# Altium PCB Ryu.PcbDoc
Units mil, origin at the board's own origin, x right, y up, seen from the top; angles counter-clockwise.
Board outline 6020 x 4528.86 mil, 2 copper layers (Top Layer, Bottom Layer); 83 components, 56 nets, 486 pads, 116 vias.
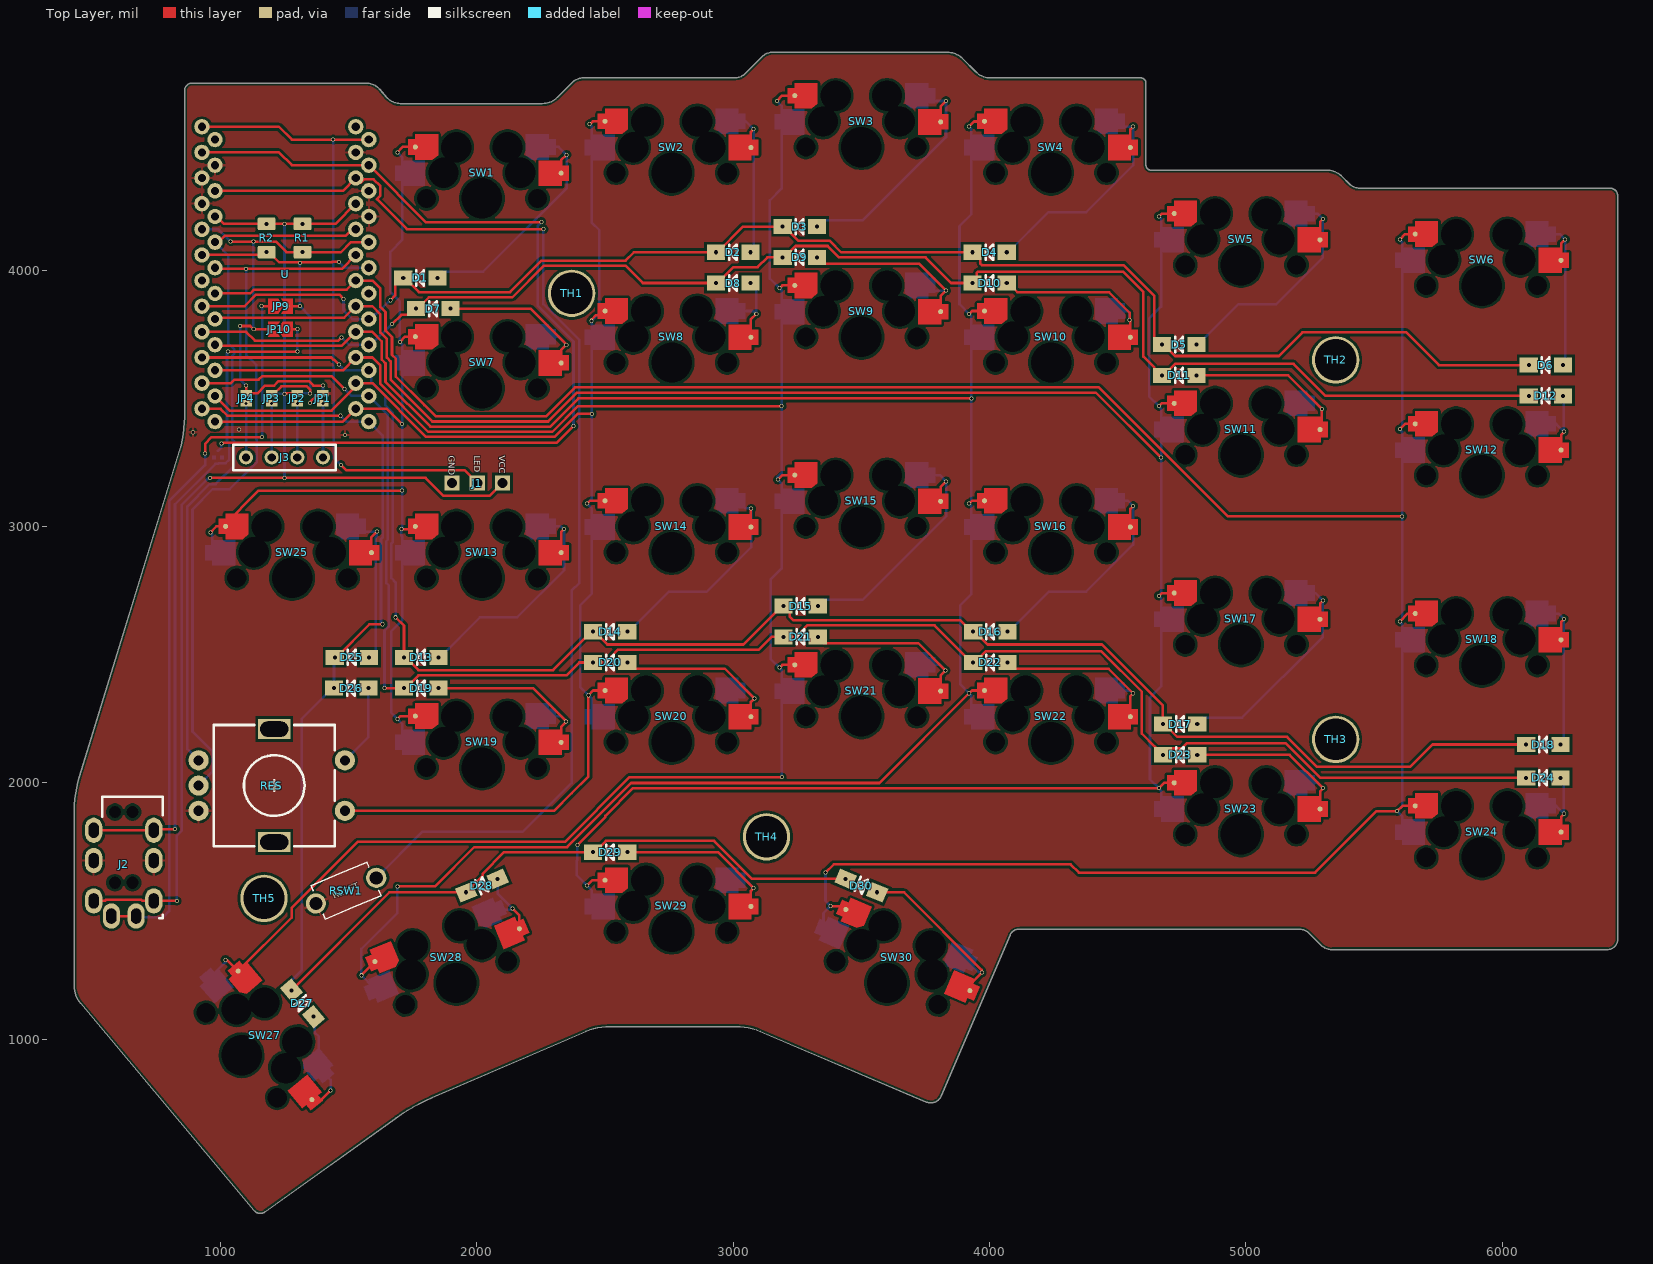
[diagram p0: Top Layer view]
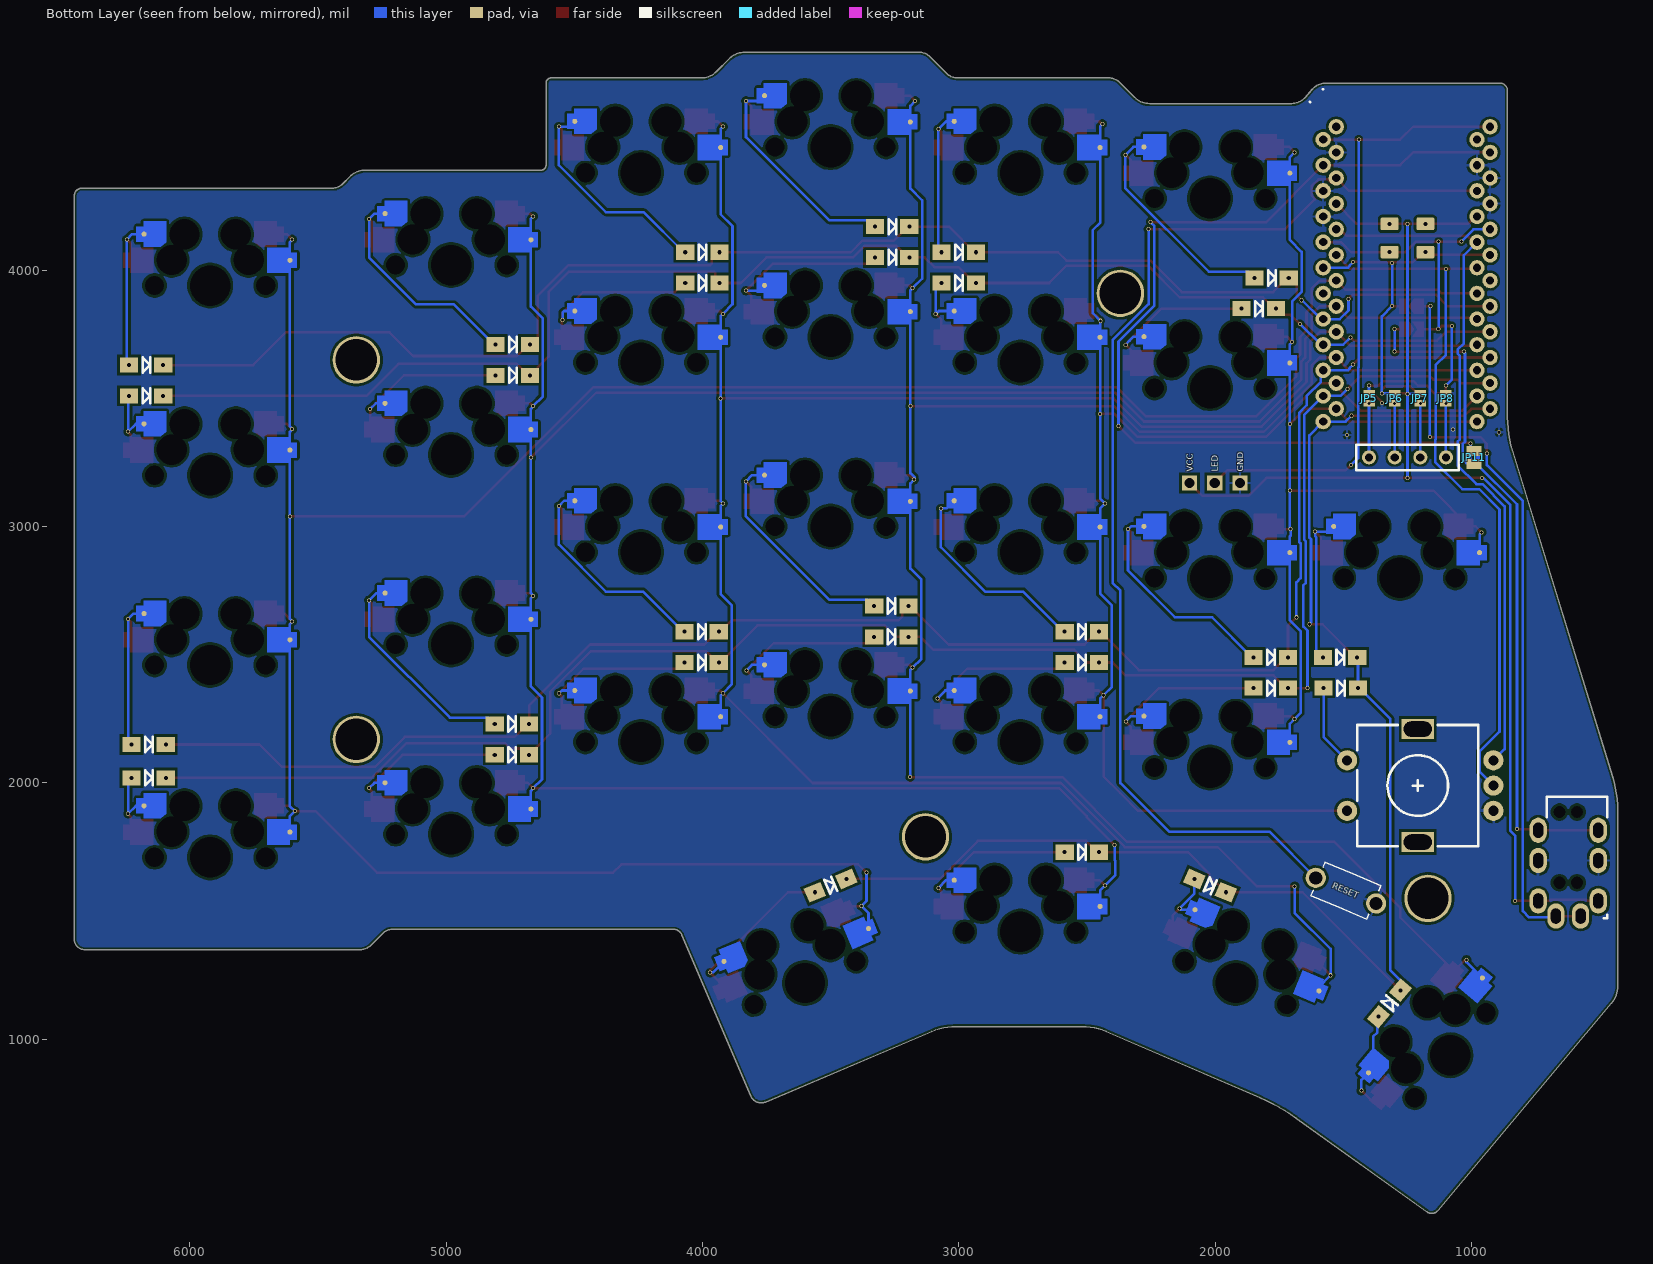
[diagram p1: Bottom Layer view, seen from below]

## Layer stack, top to bottom
Top Solder: solder mask 0.4, Solder Resist, Dk 3.5
Top Layer: signal copper 1.4
Dielectric 1: dielectric 12.6, FR-4, Dk 4.8
Bottom Layer: signal copper 1.4
Bottom Solder: solder mask 0.4, Solder Resist, Dk 3.5

## Board outline
1131.27,332.37 454.09,1141.23 cw(c533.27,1207.52) 430,1207.52 430,1893.38 cw(c873.78,1893.38) 449.56,2023.68 840.44,3296.32 ccw(c416.26,3426.61) 860,3426.62 860,4700 cw(c890,4700) 890,4730 1567.96,4730 cw(c1567.96,4659.4) 1621.1,4705.89 1648.9,4674.11 ccw(c1702.04,4720.6) 1702.04,4650 2255.86,4650 ccw(c2255.86,4732.42) 2314.14,4674.14 2372.93,4732.93 cw(c2414.14,4691.72) 2414.14,4750 3005.86,4750 ccw(c3005.86,4808.28) 3047.07,4767.07 3112.93,4832.93 cw(c3154.14,4791.72) 3154.14,4850 3835.86,4850 cw(c3835.86,4767.59) 3894.14,4825.86 3945.86,4774.14 ccw(c4004.14,4832.43) 4004.14,4750 4590,4750 cw(c4590,4730) 4610,4730 4610,4410 ccw(c4630,4410) 4630,4390 5315.86,4390 cw(c5315.86,4307.6) 5374.14,4365.86 5402.93,4337.07 ccw(c5444.14,4378.29) 5444.14,4320 6420,4320 cw(c6420,4290) 6450,4290 6450,1390 cw(c6410,1389.99) 6410,1350 5334.14,1350 cw(c5334.14,1408.28) 5292.93,1367.07 5247.07,1412.93 ccw(c5205.88,1371.75) 5205.86,1430 4620,1430 4115.16,1430 ccw(c4115.16,1391.85) 4080.09,1406.87 3810.75,778.34 cw(c3770.71,795.49) 3753.67,755.4 3105.22,1030.8 ccw(c3010.87,808.65) 3010.87,1050 2518.51,1050 ccw(c2518.51,814.66) 2425.44,1030.82 1824.45,772.05 ccw(c2121.1,83.05) 1684.12,692.78 1173.72,327 cw(c1155.39,352.57)

## Design rules (kind name [scope] priority, off if disabled: settings)
BoardOutlineClearance [All] p1: gap=10 ignorepadtopadclearanceinfootprint=FALSE except(0: Arc-SplitContinuation Track-SplitContinuation SMDPad-SplitContinuation THPad-SplitContinuation Via-SplitContinuation Fill-SplitContinuation Poly-SplitContinuation Region-SplitContinuation Text-SplitContinuation)
Clearance [All] p1: gap=10 ignorepadtopadclearanceinfootprint=FALSE except(0: Arc-Hole Track-Hole SMDPad-Hole THPad-Hole Via-Hole Fill-Hole Poly-Hole Region-Hole Text-Hole)
HoleSize [All] p1: absolutevalues=TRUE maxlimit=393.7 minlimit=1 maxpercent=80.000 minpercent=20.000
HoleToHoleClearance [All] p1 off: gap=10 allowstackedmicrovias=TRUE
MinimumSolderMaskSliver [All] p1 off: minsoldermaskwidth=10
PolygonConnect [All] p1: connectstyle=Relief reliefconductorwidth=10 reliefentries=4 polygonreliefangle="90 Angle" airgapwidth=10
RoutingVias [All] p1: holewidth=11.81 width=15.75 viastyle="Through Hole" minholewidth=11.81 minwidth=15.75 maxholewidth=11.81 maxwidth=15.75
SilkToSolderMaskClearance [IsPad] p1: minsilkscreentomaskgap=2.5 clearancetoexposedcopper=TRUE
SolderMaskExpansion [All] p1: expansion=4 istentingtop=FALSE
Width [All] p1: maxlimit=19.68 minlimit=1.97 preferedwidth=10
26 further rules are at their usual default settings.

## Components (designator, comment, footprint, x,y, rotation, side; value= is the part's Value field where it differs from the comment)
D1 "D" D_SOD123 1780,3970 r0 top
D2 "D" D_SOD123 3000,4070 r0 top
D3 "D" D_SOD123 3260,4170 r0 top
D4 "D" D_SOD123 4000,4070 r0 top
D5 "D" D_SOD123 4740,3710 r0 top
D6 "D" D_SOD123 6170,3630 r0 top
D7 "D" D_SOD123 1830,3850 r0 top
D8 "D" D_SOD123 3000,3950 r0 top
D9 "D" D_SOD123 3260,4050 r0 top
D10 "D" D_SOD123 4000,3950 r0 top
D11 "D" D_SOD123 4740,3590 r0 top
D12 "D" D_SOD123 6170,3510 r0 top
D13 "D" D_SOD123 1783.07,2490 r0 top
D14 "D" D_SOD123 2520,2590 r0 top
D15 "D" D_SOD123 3263.07,2690 r0 top
D16 "D" D_SOD123 4003.07,2590 r0 top
D17 "D" D_SOD123 4743.07,2230 r0 top
D18 "D" D_SOD123 6160,2150 r0 top
D19 "D" D_SOD123 1783.07,2370 r0 top
D20 "D" D_SOD123 2520,2470 r0 top
D21 "D" D_SOD123 3263.07,2570 r0 top
D22 "D" D_SOD123 4003.07,2470 r0 top
D23 "D" D_SOD123 4743.07,2110 r0 top
D24 "D" D_SOD123 6160,2020 r0 top
D25 "D" D_SOD123 1513.07,2490 r0 top
D26 "D" D_SOD123 1510,2370 r0 top
D27 "D" D_SOD123 1320,1140 r310 top
D28 "D" D_SOD123 2020,1600 r23 top
D29 "D" D_SOD123 2520,1730 r0 top
D30 "D" D_SOD123 3500,1600 r337 top
J1 "LED" LED 2100,3170 r270 top
J2 "4PIN" TRRS 657.32,1945.51 r0 top
J3 "OLED" OLED 1400,3270 r180 top
JP1 "JP" JUMPER 1400,3500 r90 top
JP2 "JP" JUMPER 1300,3500 r90 top
JP3 "JP" JUMPER 1200,3500 r90 top
JP4 "JP" JUMPER 1100,3500 r90 top
JP5 "JP" JUMPER 1400,3500 r90 bottom
JP6 "JP" JUMPER 1300,3500 r90 bottom
JP7 "JP" JUMPER 1200,3500 r90 bottom
JP8 "JP" JUMPER 1100,3500 r90 bottom
JP9 "IC2SCL" JUMPER_Triangle 1234,3860 r0 top
JP10 "IC2SDA" JUMPER_Triangle 1234,3770 r180 top
JP11 "Serial" JUMPER_DATA 990,3270 r90 bottom
R1 "R" RESISTOR 1320,4125.67 r270 top
R2 "R" RESISTOR 1180,4125.67 r270 top
RES "SW26" Rotary_Encoder_Alps 1210,1990 r0 top
RSW1 "SW_RST" RST_SWITCH 1490,1580 r23 top
SW1 "SW_PUSH" 1u-CherryMX-Hotswap-Dualside 2020,4280 r0 top
SW2 "SW_PUSH" 1u-CherryMX-Hotswap-Dualside 2760,4380 r0 top
SW3 "SW_PUSH" 1u-CherryMX-Hotswap-Dualside 3500,4480 r0 top
SW4 "SW_PUSH" 1u-CherryMX-Hotswap-Dualside 4240,4380 r0 top
SW5 "SW_PUSH" 1u-CherryMX-Hotswap-Dualside 4980,4020 r0 top
SW6 "SW_PUSH" 1.5u-CHERRYmx-hotswap-dualside 5920,3940 r0 top
SW7 "SW_PUSH" 1u-CherryMX-Hotswap-Dualside 2020,3540 r0 top
SW8 "SW_PUSH" 1u-CherryMX-Hotswap-Dualside 2760,3640 r0 top
SW9 "SW_PUSH" 1u-CherryMX-Hotswap-Dualside 3500,3740 r0 top
SW10 "SW_PUSH" 1u-CherryMX-Hotswap-Dualside 4240,3640 r0 top
SW11 "SW_PUSH" 1u-CherryMX-Hotswap-Dualside 4980,3280 r0 top
SW12 "SW_PUSH" 1.5u-CHERRYmx-hotswap-dualside 5920,3200 r0 top
SW13 "SW_PUSH" 1u-CherryMX-Hotswap-Dualside 2020,2800 r0 top
SW14 "SW_PUSH" 1u-CherryMX-Hotswap-Dualside 2760,2900 r0 top
SW15 "SW_PUSH" 1u-CherryMX-Hotswap-Dualside 3500,3000 r0 top
SW16 "SW_PUSH" 1u-CherryMX-Hotswap-Dualside 4240,2900 r0 top
SW17 "SW_PUSH" 1u-CherryMX-Hotswap-Dualside 4980,2540 r0 top
SW18 "SW_PUSH" 1.5u-CHERRYmx-hotswap-dualside 5920,2460 r0 top
SW19 "SW_PUSH" 1u-CherryMX-Hotswap-Dualside 2020,2060 r0 top
SW20 "SW_PUSH" 1u-CherryMX-Hotswap-Dualside 2760,2160 r0 top
SW21 "SW_PUSH" 1u-CherryMX-Hotswap-Dualside 3500,2260 r0 top
SW22 "SW_PUSH" 1u-CherryMX-Hotswap-Dualside 4240,2160 r0 top
SW23 "SW_PUSH" 1u-CherryMX-Hotswap-Dualside 4980,1800 r0 top
SW24 "SW_PUSH" 1.5u-CHERRYmx-hotswap-dualside 5920,1710 r0 top
SW25 "SW_PUSH" 1u-CherryMX-Hotswap-Dualside 1280,2800 r0 top
SW27 "SW_PUSH" 1.5u-CHERRYmx-hotswap-dualside 1082.51,938.05 r310 top
SW28 "SW_PUSH" 1u-CherryMX-Hotswap-Dualside 1920,1220 r23 top
SW29 "SW_PUSH" 1u-CherryMX-Hotswap-Dualside 2760,1420 r0 top
SW30 "SW_PUSH" 1u-CherryMX-Hotswap-Dualside 3600,1220 r337 top
TH1 "HOLE" M2_TH_HOLE 2370,3910 r0 top
TH2 "HOLE" M2_TH_HOLE 5350,3650 r0 top
TH3 "HOLE" M2_TH_HOLE 5350,2170 r0 top
TH4 "HOLE" M2_TH_HOLE 3130,1790 r0 top
TH5 "HOLE" M2_TH_HOLE 1170,1550 r0 top
U "ProMicro" ProMicro 1275,3978 r0 top

## Footprints (in the part's own frame and the unit in brackets; to place one, negate y for a bottom-side part, rotate by r counter-clockwise, add the part's x,y. Pads: shape width x height; smd on the part's side, far side on the other; paste and mask are expansions set on the pad)
1.5u-CHERRYmx-hotswap-dualside [mm]
  round 0.5 smd far side mask+0: 1(-7.9,2.5) 2(6.55,5.1)
  round 0.5 smd mask+0: 1(-6.6,5.1) 2(7.85,2.5)
  round 0 hole 1.9: ""(-5.5,0) ""(5.5,0)
  round 0 hole 3: ""(-3.81,2.54) ""(-2.54,5.08) ""(2.54,5.08) ""(3.81,2.54)
  round 0 hole 4: ""(0,0)
  Top Layer region: 5.65,3.75 7.9,3.75 7.9,3.25 8.6,3.25 8.6,1.75 7.9,1.75 7.9,1.25 5.65,1.25
  Top Layer region: -4.35,6.35 -6.6,6.35 -6.6,5.85 -7.3,5.85 -7.3,4.35 -6.6,4.35 -6.6,3.85 -4.9,3.85 -4.35,4.3
  Bottom Layer region: -5.65,1.25 -7.9,1.25 -7.9,1.75 -8.6,1.75 -8.6,3.25 -7.9,3.25 -7.9,3.75 -5.65,3.75
  Bottom Layer region: 4.35,6.35 6.6,6.35 6.6,5.85 7.3,5.85 7.3,4.35 6.6,4.35 6.6,3.85 4.9,3.85 4.35,4.3
1u-CherryMX-Hotswap-Dualside [mm]
  round 0.5 smd far side mask+0: 1(-7.9,2.5) 2(6.55,5.1)
  round 0.5 smd mask+0: 1(-6.6,5.1) 2(7.85,2.5)
  round 0 hole 1.9: ""(-5.5,0) ""(5.5,0)
  round 0 hole 3: ""(-3.81,2.54) ""(-2.54,5.08) ""(2.54,5.08) ""(3.81,2.54)
  round 0 hole 4 mask+0.102: ""(0,0)
  Top Layer region: 5.65,3.75 7.9,3.75 7.9,3.25 8.6,3.25 8.6,1.75 7.9,1.75 7.9,1.25 5.65,1.25
  Top Layer region: -4.35,6.35 -6.6,6.35 -6.6,5.85 -7.3,5.85 -7.3,4.35 -6.6,4.35 -6.6,3.85 -4.9,3.85 -4.35,4.3
  Bottom Layer region: -5.65,1.25 -7.9,1.25 -7.9,1.75 -8.6,1.75 -8.6,3.25 -7.9,3.25 -7.9,3.75 -5.65,3.75
  Bottom Layer region: 4.35,6.35 6.6,6.35 6.6,5.85 7.3,5.85 7.3,4.35 6.6,4.35 6.6,3.85 4.9,3.85 4.35,4.3
D_SOD123 [mm]
  rect 1.8x1.5 hole 0.4: 1(-1.7,0) 2(1.7,0)
  silkscreen extent -0.4,-0.75 0.35,0.75
JUMPER [mil]
  rect 25x45 smd mask+8.03: J1(-19.7,0) J2(19.7,0)
JUMPER_DATA [mm]
  rect 1x1.5 smd: J1(0.65,0) J2(-0.65,0)
  Top Layer region: -0.2,0.6 0.2,0.6 0.2,0.2 -0.2,0.2
  Top Layer region: -0.2,-0.2 0.2,-0.2 0.2,-0.6 -0.2,-0.6
JUMPER_Triangle [mm]
  round 0.1 smd mask+0: J1(-0.65,0) J2(0.85,0)
  Top Layer region: -1.225,-0.75 -0.225,-0.75 0.275,0 -0.225,0.75 -1.225,0.75
  Top Layer region: 0.075,0.75 0.575,0 0.075,-0.75 1.225,-0.75 1.225,0.75
LED [mil]
  rect 60x60 hole 39.37: 1(0,0) 2(0,-98.43) 3(0,-196.85)
M2_TH_HOLE [mm]
  round 4.7 hole 4.1: ""(0,0)
OLED [mil]
  round 55 hole 32: 1(0,0) 2(100,0) 3(200,0) 4(300,0)
  silkscreen extent -50,-50 350,50
ProMicro [mil]
  round 60 hole 32: 1(-347.24,581.5) 1(303.9,531.5) 2(-347.24,481.5) 2(303.9,431.5) 3(-347.24,381.5) 3(303.9,331.5) 4(-347.24,281.5) 4(303.9,231.5) 5(-347.24,181.5) 5(303.9,131.5) 6(-347.24,81.5) 6(303.9,31.5) 7(-347.24,-18.5) 7(303.9,-68.5) 8(-347.24,-118.5) 8(303.9,-168.5) 9(-347.24,-218.5) 9(303.9,-268.5) 10(-347.24,-318.5) 10(303.9,-368.5) 11(-347.24,-418.5) 11(303.9,-468.5) 12(-347.24,-518.5) 12(303.9,-568.5) 13(-296.1,-568.5) 13(252.76,-518.5) 14(-296.1,-468.5) 14(252.76,-418.5) 15(-296.1,-368.5) 15(252.76,-318.5) 16(-296.1,-268.5) 16(252.76,-218.5) 17(-296.1,-168.5) 17(252.76,-118.5) 18(-296.1,-68.5) 18(252.76,-18.5) 19(-296.1,31.5) 19(252.76,81.5) 20(-296.1,131.5) 20(252.76,181.5) 21(-296.1,231.5) 21(252.76,281.5) 22(-296.1,331.5) 22(252.76,381.5) 23(-296.1,431.5) 23(252.76,481.5) 24(-296.1,531.5) 24(252.76,581.5)
RESISTOR [mm]
  rrect20% 1.25x1.75 hole 0.4: 1(-1.4,0)
  rrect20% 1.25x1.75 hole 0.4 mask+0.102: 2(1.4,0)
Rotary_Encoder_Alps [mm]
  round 2 hole 1: A(-7.5,2.5) B(-7.5,0) C(-7.5,-2.5) S1(7,-2.5) S2(7,2.5)
  rect 3.2x2 hole 1.5 slot 2.8 at 0 deg: MP(0,-5.6) MP(0,5.6)
  silkscreen extent -6,-6 6,6
RST_SWITCH [mm]
  round 2 hole 1.3: 1(-3.25,0) 2(3.25,0)
  silkscreen extent -3,-1.8 3,1.8
TRRS [mm]
  oval 1.7x2.5 hole 1.5 slot 1 at 0 deg: 1(-3.85,-10.3) 1(2.1,-10.3) 2(-3.85,-6.3) 2(2.1,-6.3) 3(-3.85,-3.3) 3(2.1,-3.3) 4(-2.1,-11.8) 4(0.35,-11.8)
  round 0 hole 1.2 mask+0: ""(-1.75,-8.5) ""(-1.75,-1.5) ""(0,-8.5) ""(0,-1.5)
  silkscreen extent -3,-12 3,0

## Part data
JP9 JP10: library part JP
JP11: library part JP_C
RES: library part SW

## Via types
v1: diameter 15.75, hole 11.81, Top Layer to Bottom Layer, 116 vias

## Nets (pads, with @x,y where several pads share a name; then routed paths per layer and width w, separated by ;. In a path a pad name is that pad's centre, name@x,y a point inside that pad or via, vN(x,y) a via of type N, cw(c..) or ccw(c..) an arc to the next point about the centre after c; other vN are vias at no path point)
col0: SW6.1 SW12.1 SW18.1 SW24.1 SW30.1 U.18 | length 10584.5
  Top Layer w10: U.18@978.9,3909.5 1116.35,3909.5 1131.38,3924.53 1492.79,3924.53 1527.76,3959.5 1592.54,3959.5 1623.9,3928.14 1623.9,3856.42 1643.9,3836.42 1643.9,3764.7 1669.3,3739.3 1669.3,3670 1683.9,3655.4 1683.9,3585.46 1795.21,3474.15 1795.85,3474.15 1840,3430 2270,3430 2382.87,3542.87 4426.48,3542.87 4929.36,3040 v1(5608.98,3040) ; v1(3360,1650) 3392.18,1682.18 4315.78,1682.18 4347.95,1650 5270,1650 5510,1890 v1(5590,1890) 5610.79,1910.79 SW24.1@5660.16,1910.79 ; v1(3380,1520) 3425.62,1520 SW30.1@3439.27,1506.35 ; v1(5600,2630) 5630.79,2660.79 SW18.1@5660.16,2660.79 ; v1(5600,3380) 5620.79,3400.79 SW12.1@5660.16,3400.79 ; v1(5600,4120) 5620.79,4140.79 SW6.1@5660.16,4140.79
  Bottom Layer w10: SW30.1@3352.16,1432.13 3352.16,1492.16 v1(3380,1520) 3360,1540 v1(3360,1650) ; v1(5600,4120) 5600,4118.44 5608.98,4109.47 5608.98,4038.43 5608.98,3390.53 5600,3381.56 v1(5600,3380) 5600,3378.44 5608.98,3369.47 5608.98,3298.43 v1(5608.98,3040) 5608.98,2640.53 5600,2631.56 v1(5600,2630) 5600,2628.44 5608.98,2619.47 5608.98,2558.43 5608.98,1908.98 v1(5590,1890) 5608.98,1871.02 SW24.1@5608.98,1808.43
col1: SW5.1 SW11.1 SW17.1 SW23.1 SW29.1 U.17 | length 9540.8
  Top Layer w10: U.17@978.9,3809.5 983.93,3814.53 1482.79,3814.53 1527.76,3859.5 1592.54,3859.5 1623.9,3828.14 1623.9,3756.42 1649.3,3731.02 1649.3,3659.3 1663.9,3644.7 1663.9,3572.99 1826.89,3410 2278.28,3410 2391.16,3522.87 4414.13,3522.87 v1(4667.99,3269.02) ; v1(2392.03,1757.97) 2501.57,1867.5 2501.57,1871.57 2610,1980 v1(4660,1980) 4680.79,2000.79 SW23.1@4720.16,2000.79 ; v1(2430,1600) 2450.79,1620.79 SW29.1@2500.16,1620.79 ; v1(4660,2730) 4661.56,2730 4672.34,2740.79 SW17.1@4720.16,2740.79 ; v1(4660,3470) 4670.79,3480.79 SW11.1@4720.16,3480.79 ; v1(4660,4210) 4661.56,4210 4672.34,4220.79 SW5.1@4720.16,4220.79
  Bottom Layer w10: v1(2392.03,1757.97) 2392.03,1699.22 2390,1697.19 2390,1640 v1(2430,1600) 2448.98,1581.02 SW29.1@2448.98,1518.43 ; v1(4660,4210) 4668.98,4201.02 4668.98,4118.43 4668.98,3858.2 4622.64,3811.86 4622.64,3507.36 v1(4660,3470) 4660,3468.44 4668.98,3459.47 4668.98,3378.43 v1@4668.98,3268.03 ; v1(4667.99,3269.02) v1@4668.98,3268.03 ; SW23.1@4668.98,1898.43 4668.98,1969.47 4660,1978.44 v1(4660,1980) 4625.71,2014.29 4625.71,2333.4 4668.98,2376.67 4668.98,2638.43 4668.98,2721.02 v1(4660,2730) 4660,2731.56 4668.98,2740.53 v1@4668.98,3268.03
col2: SW4.1 SW10.1 SW16.1 SW22.1 SW28.1 U.16 | length 9007.7
  Top Layer w10: U.16@978.9,3709.5 982.92,3705.47 1473.73,3705.47 1527.76,3759.5 1592.54,3759.5 1629.3,3722.73 1629.3,3651.02 1643.9,3636.42 1643.9,3564.7 1818.6,3390 2286.57,3390 2396.57,3500 v1(3928.98,3500) ; v1(1550,1250) 1550,1250.47 1602.36,1302.83 SW28.1@1602.36,1303.3 ; v1(1690,1596.72) 1836.72,1596.72 1990,1750 2351.72,1750 2601.72,2000 3570,2000 v1(3920,2350) 3921.56,2350 3932.34,2360.79 SW22.1@3980.16,2360.79 ; v1(3920,3090) 3921.56,3090 3932.34,3100.79 SW16.1@3980.16,3100.79 ; v1(3920,3830) 3921.56,3830 3932.34,3840.79 SW10.1@3980.16,3840.79 ; v1(3920,4560) 3940,4580 3979.37,4580 SW4.1@3980.16,4580.79
  Bottom Layer w10: SW28.1@1595.24,1189.07 1595.24,1204.76 v1(1550,1250) 1550,1353.36 1690,1493.36 v1(1690,1596.72) ; v1(3920,4560) 3928.98,4551.02 3928.98,4478.43 3928.98,4218.2 3882.64,4171.86 3882.64,3867.36 v1(3920,3830) 3928.98,3821.02 3928.98,3738.43 v1(3928.98,3500) 3928.98,3100.53 3920,3091.56 v1(3920,3090) 3928.98,3081.02 3928.98,2998.43 3928.98,2736.67 3885.71,2693.4 3885.71,2384.29 v1(3920,2350) 3928.98,2341.02 SW22.1@3928.98,2258.43
col3: SW3.1 SW9.1 SW15.1 SW21.1 SW27.1 U.15 | length 8067.9
  Top Layer w10: U.15@978.9,3609.5 1477.76,3609.5 1527.76,3659.5 1592.54,3659.5 1623.9,3628.14 1623.9,3556.42 1810.32,3370 2294.85,3370 2394.85,3470 v1(3188.98,3470) ; v1(1020,1310) 1021.1,1308.9 1026.56,1308.9 1069.3,1266.16 1277.52,1474.38 1277.52,1512.2 1535.32,1770 2343.43,1770 2596.31,2022.87 v1(3190,2022.87) ; v1(3170,4660) 3190.79,4680.79 SW3.1@3240.16,4680.79 ; v1(3174.65,3182.83) 3192.61,3200.79 SW15.1@3240.16,3200.79 ; v1(3180,2450) 3181.56,2450 3192.34,2460.79 SW21.1@3240.16,2460.79 ; v1(3180,3930) 3181.56,3930 3192.34,3940.79 SW9.1@3240.16,3940.79
  Bottom Layer w10: SW27.1@957.99,1239.57 1020,1301.58 v1(1020,1310) ; v1(3170,4660) 3188.98,4641.02 3188.98,4578.43 3188.98,4318.2 3142.64,4271.86 3142.64,3967.36 v1(3180,3930) 3188.98,3921.02 3188.98,3838.43 v1(3188.98,3470) 3188.98,3208.98 3172.89,3192.89 3173.56,3192.22 3173.56,3183.93 v1(3174.65,3182.83) 3188.98,3168.51 3188.98,3098.43 3188.98,2836.67 3145.71,2793.4 3145.71,2484.29 v1(3180,2450) 3188.98,2441.02 3188.98,2358.43 3189.49,2357.91 3189.49,2023.39 v1(3190,2022.87)
col4: RES.S1 SW2.1 SW8.1 SW14.1 SW20.1 U.14 | length 5668.1
  Top Layer w10: U.14@978.9,3509.5 1036.02,3452.37 1434.14,3452.37 1527.76,3545.98 1527.76,3559.5 1592.54,3559.5 1802.03,3350 2303.14,3350 2393.14,3440 v1(2448.98,3440) ; RES.S1 2301.57,1891.57 2370,1960 2435.46,2025.46 v1(2435.46,2342.23) 2454.02,2360.79 SW20.1@2500.16,2360.79 ; v1(2430,3090) 2431.56,3090 2442.34,3100.79 SW14.1@2500.16,3100.79 ; v1(2440,4570) 2441.56,4570 2452.34,4580.79 SW2.1@2500.16,4580.79 ; v1(2447.2,3802.8) 2448.3,3803.9 2448.3,3808.18 2463.68,3823.56 2482.26,3823.56 2499.49,3840.79 SW8.1@2500.16,3840.79
  Bottom Layer w10: v1(2440,4570) 2448.98,4561.02 2448.98,4478.43 2448.98,4184.91 2477.52,4156.36 2477.52,3833.12 2448.98,3804.57 2448.98,3738.43 v1(2448.98,3440) 2448.98,3108.98 v1(2430,3090) 2448.98,3071.02 2448.98,2998.43 2448.98,2738.2 2402.64,2691.86 2402.64,2375.05 v1(2435.46,2342.23) 2448.98,2328.71 SW20.1@2448.98,2258.43
col5: SW1.1 SW7.1 SW13.1 SW19.1 SW25.1 U.13 | length 4346.6
  Top Layer w10: v1(960.6,2977.71) 983.68,3000.79 1010,3000.79 ; U.13@978.9,3409.5 1477.76,3409.5 1527.76,3459.5 1649.48,3459.5 v1(1708.98,3400) ; SW25.1@1020.16,3000.79 1010,3000.79 ; v1(1690,2250) 1691.56,2250 1702.34,2260.79 SW19.1@1760.16,2260.79 ; v1(1690,4460) 1710.79,4480.79 SW1.1@1760.16,4480.79 ; v1(1700,3720) 1720.79,3740.79 SW7.1@1760.16,3740.79 ; v1(1706.13,2990) 1746.75,2990 1757.54,3000.79 SW13.1@1760.16,3000.79 ; v1(1708.98,3140) 1149.21,3140 1010,3000.79
  Bottom Layer w10: v1(960.6,2977.71) 968.98,2969.34 SW25.1@968.98,2898.43 ; v1(1690,4460) 1708.98,4441.02 1708.98,4378.43 1708.98,4118.2 1662.64,4071.86 1662.64,3915.39 1700,3878.03 v1(1700,3720) 1708.98,3711.02 1708.98,3638.43 v1(1708.98,3400) v1(1708.98,3140) v1@1708.98,2992.85 ; v1(1706.13,2990) 1706.13,2964.98 1708.98,2962.13 1708.98,2898.43 1708.98,2634.61 1665.71,2591.34 1665.71,2274.29 v1(1690,2250) 1708.98,2231.02 SW19.1@1708.98,2158.43
DATA: JP11.J1 U.2 | length 3734.7
  Top Layer w10: U.2@927.76,4459.5 1228.33,4459.5 1278.33,4409.5 1578.9,4409.5 1802.13,4186.26 2247.7,4186.26 2249.94,4188.5 v1(2251.5,4188.5) ; v1(1003.55,3324.73) 1004.65,3325.83 1011.83,3325.83 1013.13,3327.13 2312.61,3327.13 v1(2377.13,3391.64)
  Bottom Layer w10: JP11.J1 1003.55,3309.14 v1(1003.55,3324.73) ; v1(2251.5,4188.5) 2251.5,4186.95 2237.13,4172.58 2237.13,3861.8 2377.13,3721.8 v1(2377.13,3391.64)
ENCA: RES.A U.20 | length 2738.1
  Top Layer w10: U.20@979.56,4110.16 978.9,4109.5 992.43,4109.5 1017.43,4134.5 1489.23,4134.5 1514.23,4159.5 U.20@1527.76,4159.5
  Bottom Layer w10: RES.A 871.16,2131.99 871.16,3078.84 957.94,3165.62 981.64,3165.62 1054.53,3238.51 1054.53,3331.21 1045.74,3340 1045.74,3665.76 1054.53,3674.55 1054.53,3690.19 1030,3714.72 1030,4058.39 U.20@978.9,4109.5
ENCB: RES.B U.19 | length 2803.3
  Top Layer w10: U.19@978.9,4009.5 983.2,4005.2 v1(1100,4005.2) 1473.46,4005.2 U.19@1527.76,4059.5
  Bottom Layer w10: RES.B 969.09,2044.37 969.09,2122.06 891.16,2200 891.16,3066.78 970,3145.62 1035.72,3145.62 1142.5,3252.4 1142.5,3338.03 1140,3340.53 1140,3630 1100,3670 v1(1100,4005.2)
GND: J1.3 J2.2 JP1.J2 JP8.J2 RES.C RSW1.1 U.3 U.4 U.23 | length 68.3
  Top Layer w10: v1(1350,3482) 1351.1,3483.1 1351.1,3487.61 1375.69,3512.2 1392.5,3512.2 JP1.J2
  other v1: 1486,3358 893,3368 1073,3378
LED: J1.2 U.1 | length 2514.8
  Top Layer w10: U.1@927.76,4559.5 1228.33,4559.5 1278.33,4509.5 U.1@1578.9,4509.5 ; v1(1470,3240) 1490,3220 1951.57,3220 J1.2
  Bottom Layer w10: v1(1440,4510) 1440,3622.9 1442.5,3620.4 1442.5,3267.5 v1(1470,3240)
NetD1_2: D1.2 SW1.2 | length 943.6
  Top Layer w10: SW1.2@2329.06,4378.43 2329.06,4429.06 v1(2350,4450)
  Bottom Layer w10: D1.2 1871.46,3994.53 2025.17,3994.53 2350,4319.36 v1(2350,4450) 2319.21,4480.79 SW1.2@2277.87,4480.79
NetD2_2: D2.2 SW2.2 | length 636.4
  Top Layer w10: SW2.2@3069.06,4478.43 3069.06,4539.06 v1(3080,4550)
  Bottom Layer w10: SW2.2@3017.87,4580.79 3049.21,4580.79 v1(3080,4550) 3080,4083.07 D2.2
NetD3_2: D3.2 SW3.2 | length 959.4
  Top Layer w10: SW3.2@3809.06,4578.43 3809.06,4639.06 v1(3830,4660)
  Bottom Layer w10: D3.2 3351.46,4194.53 3505.17,4194.53 3830,4519.36 v1(3830,4660) 3778.66,4660 SW3.2@3757.87,4680.79
NetD4_2: D4.2 SW4.2 | length 941.1
  Top Layer w10: SW4.2@4549.06,4478.43 4549.06,4549.06 v1(4560,4560)
  Bottom Layer w10: D4.2 4072.83,4070 4229.25,4226.41 4377.05,4226.41 4560,4409.36 v1(4560,4560) 4518.66,4560 SW4.2@4497.87,4580.79
NetD5_2: D5.2 SW5.2 | length 941.1
  Top Layer w10: SW5.2@5289.06,4118.43 5289.06,4189.06 v1(5300,4200)
  Bottom Layer w10: D5.2 4812.83,3710 4969.25,3866.41 5117.05,3866.41 5300,4049.36 v1(5300,4200) 5279.21,4220.79 SW5.2@5237.87,4220.79
NetD6_2: D6.2 SW6.2 | length 657.3
  Top Layer w10: SW6.2@6229.06,4038.43 6229.06,4103.63 6245.04,4119.61 v1(6245.04,4120)
  Bottom Layer w10: SW6.2@6177.87,4140.79 6224.25,4140.79 v1(6245.04,4120) 6245.04,3638.11 D6.2
NetD7_2: D7.2 SW7.2 | length 676.9
  Top Layer w10: D7.2 2210,3850 2350,3710 2329.06,3689.06 SW7.2@2329.06,3638.43
  Bottom Layer w10: SW7.2@2277.87,3740.79 2319.21,3740.79 2333.47,3726.53 2333.47,3725.74 2348.83,3710.38 v1(2348.83,3708.83)
NetD8_2: D8.2 SW8.2 | length 306.4
  Top Layer w10: SW8.2@3069.06,3738.43 3069.06,3809.06 v1(3090,3830)
  Bottom Layer w10: SW8.2@3017.87,3840.79 3077.66,3840.79 3088.44,3830 v1(3090,3830) 3090,3926.93 D8.2
NetD9_2: D9.2 SW9.2 | length 727.9
  Top Layer w10: D9.2 3351.46,4025.47 3724.53,4025.47 v1(3830,3920) 3809.06,3899.06 SW9.2@3809.06,3838.43
  Bottom Layer w10: SW9.2@3757.87,3940.79 3778.66,3920 v1(3830,3920)
NetD10_2: D10.2 SW10.2 | length 702.9
  Top Layer w10: D10.2 4072.83,3950 4108.78,3914.06 4465.94,3914.06 4546.76,3833.24 4546.76,3823.24 4546.46,3822.93 4546.46,3806.46 v1(4545.36,3805.36) ; SW10.2@4549.06,3738.43 v1@4549.06,3805.36
  Bottom Layer w10: SW10.2@4497.87,3840.79 4539.21,3840.79 4545.36,3834.64 v1(4545.36,3805.36)
NetD11_2: D11.2 SW11.2 | length 698.9
  Top Layer w10: D11.2 5165.02,3590 v1(5296.42,3458.6) 5296.42,3406.42 5284.14,3394.14 5287.2,3391.08 5287.2,3380.28 SW11.2@5289.06,3378.43
  Bottom Layer w10: SW11.2@5237.87,3480.79 5274.23,3480.79 v1(5296.42,3458.6)
NetD12_2: D12.2 SW12.2 | length 292.3
  Top Layer w10: SW12.2@6229.06,3298.43 6229.06,3357.5 6240,3368.44 v1(6240,3370)
  Bottom Layer w10: SW12.2@6177.87,3400.79 6209.21,3400.79 v1(6240,3370) 6240,3506.93 D12.2
NetD13_2: D13.2 SW13.2 | length 953.9
  Top Layer w10: SW13.2@2329.06,2898.43 2329.06,2979.06 v1(2340,2990)
  Bottom Layer w10: D13.2 1855.91,2490 2012.32,2646.41 2157.05,2646.41 2340,2829.36 v1(2340,2990) 2338.44,2990 2327.66,3000.79 SW13.2@2277.87,3000.79
NetD14_2: D14.2 SW14.2 | length 907
  Top Layer w10: SW14.2@3069.06,2998.43 3069.06,3069.06 v1(3070,3070)
  Bottom Layer w10: D14.2 2592.83,2590 2749.25,2746.41 2897.05,2746.41 3070,2919.36 v1(3070,3070) 3068.9,3071.1 3047.56,3071.1 SW14.2@3017.87,3100.79
NetD15_2: D15.2 SW15.2 | length 951.9
  Top Layer w10: SW15.2@3809.06,3098.43 3809.06,3155.31 v1(3830.43,3176.68)
  Bottom Layer w10: D15.2 3354.53,2714.53 3505.17,2714.53 3830.43,3039.79 v1(3830.43,3176.68) 3806.33,3200.79 SW15.2@3757.87,3200.79
NetD16_2: D16.2 SW16.2 | length 938.1
  Top Layer w10: SW16.2@4549.06,2998.43 4549.06,3069.06 v1(4560,3080)
  Bottom Layer w10: D16.2 4075.91,2590 4232.32,2746.41 4377.05,2746.41 4560,2929.36 v1(4560,3080) 4539.21,3100.79 SW16.2@4497.87,3100.79
NetD17_2: D17.2 SW17.2 | length 926.5
  Top Layer w10: SW17.2@5289.06,2638.43 5289.06,2699.46 5300.35,2710.76 v1(5300.35,2712.32)
  Bottom Layer w10: D17.2 4834.53,2254.53 4985.17,2254.53 5300.35,2569.71 v1(5300.35,2712.32) 5271.88,2740.79 SW17.2@5237.87,2740.79
NetD18_2: D18.2 SW18.2 | length 652.3
  Top Layer w10: SW18.2@6229.06,2558.43 6229.06,2627.5 6240,2638.44 v1(6240,2640)
  Bottom Layer w10: SW18.2@6177.87,2660.79 6219.21,2660.79 v1(6240,2640) 6240,2163.07 D18.2
NetD19_2: D19.2 SW19.2 | length 726.9
  Top Layer w10: D19.2 2220,2370 2350,2240 2329.06,2219.06 SW19.2@2329.06,2158.43 ; v1(2347.13,2240) v1@2348.56,2238.56
  Bottom Layer w10: SW19.2@2277.87,2260.79 2329.21,2260.79 2348.56,2241.44 v1(2347.13,2240)
NetD20_2: D20.2 SW20.2 | length 709.4
  Top Layer w10: D20.2 2611.46,2445.47 2967.46,2445.47 v1(3083.04,2329.89) 3069.06,2315.9 SW20.2@3069.06,2258.43
  Bottom Layer w10: SW20.2@3017.87,2360.79 3052.15,2360.79 v1(3083.04,2329.89)
NetD21_2: D21.2 SW21.2 | length 720.7
  Top Layer w10: D21.2 3354.53,2545.47 3721.84,2545.47 v1(3828.38,2438.94) 3809.06,2419.61 SW21.2@3809.06,2358.43
  Bottom Layer w10: SW21.2@3757.87,2460.79 3806.53,2460.79 v1(3828.38,2438.94)
NetD22_2: D22.2 SW22.2 | length 702.4
  Top Layer w10: D22.2 4094.53,2445.47 4464.53,2445.47 v1(4560,2350) 4549.06,2339.06 SW22.2@4549.06,2258.43
  Bottom Layer w10: SW22.2@4497.87,2360.79 4547.66,2360.79 4558.44,2350 v1(4560,2350)
NetD23_2: D23.2 SW23.2 | length 700.7
  Top Layer w10: D23.2 5170,2110 v1(5300,1980) 5300,1978.44 5289.06,1967.5 SW23.2@5289.06,1898.43
  Bottom Layer w10: SW23.2@5237.87,2000.79 5279.21,2000.79 v1(5300,1980)
NetD24_2: D24.2 SW24.2 | length 296.4
  Top Layer w10: SW24.2@6229.06,1808.43 6229.06,1867.5 6240,1878.44 v1(6240,1880)
  Bottom Layer w10: SW24.2@6177.87,1910.79 6209.21,1910.79 v1(6240,1880) 6240,2006.93 D24.2
NetD25_2: D25.2 SW25.2 | length 674.5
  Top Layer w10: SW25.2@1589.06,2898.43 1589.06,2959.06 v1(1610,2980)
  Bottom Layer w10: SW25.2@1537.87,3000.79 1558.66,2980 v1(1610,2980) 1610,2962.6 1606.42,2959.02 1606.42,2514.53 1581.89,2490 D25.2
NetD27_2: D27.2 SW27.2 | length 404.6
  Top Layer w10: SW27.2@1356.57,764.56 1394.56,764.56 v1(1430,800)
  Bottom Layer w10: D27.2 1367.12,1084.63 1367.12,1027.61 1383.65,1011.08 1383.65,888 1402.08,869.57 1430,841.65 v1(1430,800)
NetD28_2: D28.2 SW28.2 | length 284.9
  Top Layer w10: v1(2140,1510) 2166.03,1483.97 SW28.2@2166.03,1431.36
  Bottom Layer w10: SW28.2@2078.92,1505.59 v1@2134.03,1505.59 ; D28.2 2081.61,1568.39 v1(2140,1510)
NetD29_2: D29.2 SW29.2 | length 702
  Top Layer w10: D29.2 2940,1730 v1(3080,1590) 3069.06,1579.06 SW29.2@3069.06,1518.43
  Bottom Layer w10: SW29.2@3017.87,1620.79 3049.21,1620.79 v1(3080,1590)
NetD30_2: D30.2 SW30.2 | length 706.3
  Top Layer w10: D30.2 3666.11,1573.85 3968.9,1271.05 3968.9,1261.1 v1(3970,1260) 3922.94,1212.94 SW30.2@3922.94,1189.84
  Bottom Layer w10: SW30.2@3915.83,1304.07 3958.79,1261.1 3968.9,1261.1 v1(3970,1260)
NetJ2_3: J2.3 JP10.J1 JP11.J2 | length 2696.9
  Top Layer w10: J2.3@505.75,1815.59 740,1815.59 740,1820 v1(822.87,1820) ; v1(1030,3682.37) 1030.23,3682.6 1120,3682.6 1120.11,3682.48 1299.89,3682.48 v1(1300,3682.37) ; JP10.J1 v1(1300,3770)
  Bottom Layer w10: v1(822.87,1820) 822.87,3087.13 980.16,3244.41 JP11.J2 992.72,3247.13 1019.84,3247.13 1034.53,3261.82 1034.53,3321.49 1025.74,3330.28 1025.74,3675.74 1028.9,3678.9 1028.9,3681.27 v1(1030,3682.37) ; v1(1300,3682.37) v1(1300,3770)
NetJ2_4: J2.4 JP9.J1 | length 2912.2
  Top Layer w10: J2.4@574.65,1480.94 J2.4@671.1,1480.94 ; v1(940,3285) 940,3323 966,3349 1161.87,3349 v1(1162.87,3350) ; v1(1160,3860) JP9.J1
  Bottom Layer w10: J2.4@671.1,1480.94 676.26,1475.79 775.79,1475.79 800,1500 800,3100 940,3240 v1(940,3285) ; v1(1160,3860) 1160,3858.44 1162.5,3855.94 1162.5,3350.37 v1(1162.87,3350)
NetJ3_1: J3.1 JP1.J1 JP5.J1 | length 210.3
  Bottom Layer w10: J3.1 v1(1400,3480.3)
NetJ3_2: J3.2 JP2.J1 JP6.J1 | length 210.3
  Bottom Layer w10: J3.2 v1(1300,3480.3)
NetJ3_3: J3.3 JP3.J1 JP7.J1 | length 210.3
  Bottom Layer w10: J3.3 v1(1200,3480.3)
NetJ3_4: J3.4 JP4.J1 JP8.J1 | length 210.3
  Bottom Layer w10: J3.4 v1(1100,3480.3)
RESET: RSW1.2 U.22 | length 4591.1
  Top Layer w10: U.22@978.9,4309.5 1477.76,4309.5 1527.76,4359.5 1546.51,4340.75 1560.26,4354.5 1597.54,4354.5 1623.9,4328.14 1623.9,4290.86 1610.15,4277.11 1727.25,4160 v1(2260,4160)
  Bottom Layer w10: RSW1.2 1787.79,1810 2180,1810 2370,2000 2370,2750 2400,2780 2400,3727.94 2260,3867.94 v1(2260,4160)
row0: D1.1 D2.1 D3.1 D4.1 D5.1 D6.1 U.8 | length 5888
  Top Layer w10: U.8@927.76,3859.5 1094.63,3859.5 1139.66,3904.53 1463.92,3904.53 1480.24,3888.2 v1(1480.24,3887.21) ; v1(1662.84,3882.84) 1682.64,3902.64 1682.64,3945.47 1707.17,3970 D1.1 1718.98,3970 1774.45,3914.53 2130,3914.53 2252.99,4037.52 2580,4037.52 2612.48,4070 D2.1 2938.98,4070 3038.98,4170 D3.1 3198.98,4170 3254.45,4114.53 3376.86,4114.53 3421.39,4070 D4.1 3938.98,4070 3963.5,4045.47 3963.5,4026.5 3970,4020 4522.43,4020 4642.64,3899.79 4642.64,3734.53 4667.17,3710 D5.1 4678.98,3710 4723.5,3665.47 5128.37,3665.47 5220.42,3757.52 5625.29,3757.52 5752.81,3630 D6.1
  Bottom Layer w10: v1(1480.24,3887.21) 1480,3886.97 1480,3843.61 1514.12,3809.5 1578.9,3809.5 1587.94,3809.5 1661.28,3882.84 v1(1662.84,3882.84)
row1: D7.1 D8.1 D9.1 D10.1 D11.1 D12.1 U.9 | length 5901
  Top Layer w10: U.9@927.76,3759.5 1100.14,3759.5 1134.16,3725.47 1459.83,3725.47 1471.4,3737.04 v1(1472.96,3737.04) ; v1(1670,3790) 1705.47,3825.47 1738.54,3825.47 D7.1 1768.98,3850 1813.5,3894.53 2138.65,3894.53 2261.64,4017.52 2580.29,4017.52 2647.81,3950 D8.1 2938.98,3950 3001.24,4012.26 3095.37,4012.26 3133.1,4050 D9.1 3198.98,4050 3243.5,4094.53 3368.58,4094.53 3413.1,4050 3750,4050 3850,3950 D10.1 3950,3966.93 3950,3990 3954.53,3994.53 4519.61,3994.53 4600,3914.14 4600,3663.07 4642.64,3620.43 4642.64,3614.53 4667.17,3590 D11.1 4678.98,3590 4723.5,3634.53 5185.47,3634.53 5310,3510 D12.1
  Bottom Layer w10: v1(1472.96,3737.04) 1500.5,3709.5 1578.9,3709.5 1587.94,3709.5 1668.44,3790 v1(1670,3790)
row2: D13.1 D14.1 D15.1 D16.1 D17.1 D18.1 U.10 | length 6745.7
  Top Layer w10: U.10@927.76,3659.5 1432.87,3659.5 1441.73,3650.64 1444.6,3650.64 v1(1462.87,3632.37) ; v1(1683.25,2646.34) 1716.14,2613.45 D13.1 1722.05,2490 1772.05,2440 2297.17,2440 2447.17,2590 D14.1 2458.98,2590 2508.98,2540 3040.24,2540 3190.24,2690 D15.1 3220,2666.14 3220,2650 3235.47,2634.53 3885.71,2634.53 3930.24,2590 D16.1 3942.05,2590 3992.05,2540 4438.28,2540 4676.14,2302.14 D17.1 4682.05,2230 4732.05,2180 5160,2180 5277.52,2062.48 5640.29,2062.48 5727.81,2150 D18.1
  Bottom Layer w10: v1(1462.87,3632.37) 1462.87,3630.81 1475.8,3617.89 1475.8,3616.57 1482.87,3609.5 1578.9,3609.5 1587.54,3600.86 1587.54,3564.5 1643.34,3508.69 1643.34,3473.34 1672.87,3443.8 1672.87,2940.62 1666.42,2934.17 1666.42,2799.45 1683.25,2782.61 v1(1683.25,2646.34)
row3: D19.1 D20.1 D21.1 D22.1 D23.1 D24.1 U.11 | length 6855.1
  Top Layer w10: U.11@927.76,3559.5 1040.84,3559.5 1054.29,3572.95 1149.28,3572.95 1163.53,3587.2 1432.99,3587.2 v1(1483.69,3536.51) ; v1(1640,2370) D19.1 1722.05,2370 1772.05,2420 2350,2420 2400,2470 D20.1 2503.5,2470 2524.39,2490.89 2524.39,2493.64 2550.76,2520 3100,2520 3150,2570 D21.1 3246.57,2570 3267.46,2590.89 3267.46,2593.64 3288.35,2614.53 3785.71,2614.53 3930.24,2470 D22.1 3942.05,2470 3986.57,2514.53 4435.47,2514.53 4593.58,2356.42 4593.58,2192.56 4645.71,2140.43 4645.71,2134.53 4670.24,2110 D23.1 4700.67,2134.53 4748.35,2134.53 4768.35,2154.53 5155.47,2154.53 5290,2020 D24.1
  Bottom Layer w10: v1(1483.69,3536.51) 1510.7,3509.5 1578.9,3509.5 1652.87,3435.52 1652.87,2948.91 1646.42,2942.45 1646.42,2780.72 1655.75,2771.39 1655.75,2609.67 1640,2593.92 v1(1640,2370)
row4: D25.1 D26.1 D27.1 D28.1 D29.1 D30.1 U.12 | length 5571.6
  Top Layer w10: U.12@927.76,3459.5 1000.5,3459.5 1027.63,3432.37 v1(1468.28,3432.37) ; D27.1 1659.56,1573.85 D28.1 2022.45,1637.91 2022.45,1645.7 2106.76,1730 D29.1 2458.98,1730 2503.5,1774.53 2925.47,1774.53 3073.85,1626.15 D30.1 ; D25.1 1452.05,2490 1581.19,2619.14 v1(1632.87,2619.14)
  Bottom Layer w10: D27.1 1276.82,1191.43 1276.82,1230.32 1317.85,1271.35 1317.85,2250.68 1437.17,2370 D26.1 1443.07,2486.93 D25.1 ; v1(1468.28,3432.37) 1491.16,3409.5 1578.9,3409.5 1632.87,3355.52 1632.87,2957.19 1626.42,2950.73 1626.42,2627.15 1632.87,2620.7 v1(1632.87,2619.14)
SCL: JP3.J2 JP6.J2 JP9.J2 R2.2 U.6 | length 1485
  Top Layer w10: U.6@927.76,4059.5 1168.94,4059.5 R2.2 1189.84,4070.55 1229.45,4030.95 v1@1310,4030.95 ; JP3.J2 1210,3519.7 1237.5,3547.2 1336.94,3547.2 1350,3534.14 v1(1350,3520) ; JP9.J2 v1(1310,3860) ; v1(1310,4028.07) v1@1310,4030.95 ; v1(1462.87,4032.37) 1436.42,4032.37 1435,4030.95 v1@1310,4030.95
  Bottom Layer w10: JP6.J2 1300.15,3519.85 1349.85,3519.85 v1(1350,3520) 1350,3820 v1(1310,3860) v1(1310,4028.07) ; v1(1462.87,4032.37) 1462.87,4030.81 1475.8,4017.89 1475.8,4016.57 1482.87,4009.5 U.6@1578.9,4009.5
SDA: JP4.J2 JP5.J2 JP10.J2 R1.2 U.5 | length 1805
  Top Layer w10: v1(1040,4111.62) v1(1128.16,4111.62) 1216.31,4111.62 1257.39,4070.55 R1.2 1320.55,4070 1470,4070 1509.5,4109.5 U.5@1578.9,4109.5 ; v1(1077.13,3782.37) 1116.07,3782.37 1128.44,3770 v1(1130,3770) JP10.J2 ; v1(1100,3550.07) JP4.J2 1143.79,3519.7 1174.09,3550 1210,3550 1227.2,3567.2 1345.23,3567.2 1362.35,3550.07 v1(1400,3550.07)
  Bottom Layer w10: U.5@927.76,4159.5 992.54,4159.5 1040,4112.03 v1(1040,4111.62) ; v1(1077.13,3782.37) 1077.13,3572.95 v1(1100,3550.07) ; v1(1128.16,4111.62) 1128.16,3771.84 v1(1130,3770) ; JP5.J2 v1(1400,3550.07)
SW26B: D26.2 RES.S2 | length 319.4
  Bottom Layer w10: RES.S2 1576.93,2179.76 D26.2
VCC: J1.1 J2.1 JP2.J2 JP7.J2 R1.1 R2.1 U.21 | length 4912
  Top Layer w10: J2.1@505.75,1540 549.41,1540 554.57,1545.16 691.18,1545.16 696.33,1540 740,1540 v1(830,1540) ; v1(960,3190) v1(1250,3190) 1800,3190 1870,3120 2050,3120 J1.1 ; U.21@978.9,4209.5 985.12,4209.5 1013.83,4180.79 R2.1 v1(1250,4180.79) R1.1 1449.05,4180.79 U.21@1527.76,4259.5 ; v1(1250,3517.13) 1251.56,3517.13 1254.28,3519.85 1299.85,3519.85 JP2.J2
  Bottom Layer w10: v1(830,1540) 830,1794.78 850,1814.78 850,3085.97 952.93,3188.9 958.9,3188.9 v1(960,3190) ; JP7.J2 1201.47,3518.23 1248.9,3518.23 v1(1250,3517.13) ; v1(1250,3190) v1(1250,3517.13) ; v1(1250,4180.79) v1(1250,3517.13)
pads on no net: J2. RES.MP SW1. SW2. SW3. SW4. SW5. SW6. SW7. SW8. SW9. SW10. SW11. SW12. SW13. SW14. SW15. SW16. SW17. SW18. SW19. SW20. SW21. SW22. SW23. SW24. SW25. SW27. SW28. SW29. SW30. TH1. TH2. TH3. TH4. TH5. U.7 U.24

## Polygon pours and split planes (outlines as drawn)
GND on Top Layer "GND_L01_P000" (solid, pour order 0): -540,5553 -197,5210 6849,5210 6849,108 6479,-262 -487,-262
GND on Bottom Layer "GND_L02_P001" (solid, pour order 1): 368,5164 6651,5164 6941,4874 6658,4591 6658,278 -29,278 -197,446

## Silkscreen, mask and mechanical layers (free items; w line width, h text height)
Board Shape:
  the board outline again, w0

## Text inside footprints (layer, text, board x,y; h text height)
J1: Top Overlay "VCC" at 2088.19,3276.3 h23.62 r270; Top Overlay "GND" at 1891.34,3276.3 h23.62 r270; Bottom Overlay "VCC" at 2088.19,3213.31 h23.62 r270; Bottom Overlay "GND" at 1891.34,3213.31 h23.62 r270
RSW1: Top Overlay "RESET" at 1443.89,1547.6 h23.62 r23; Bottom Overlay "RESET" at 1545.33,1590.66 h23.62 r23